# Altium PCB Skayboard.PcbDoc (part 3 of 3)
Units mil, origin at the board's own origin, x right, y up, seen from the top; angles counter-clockwise.
Board outline 13972.57 x 4222.54 mil, 2 copper layers (Top Layer, Bottom Layer); 328 components, 109 nets, 864 pads, 207 vias.
Unrouted connection lines stored in the file: 225.
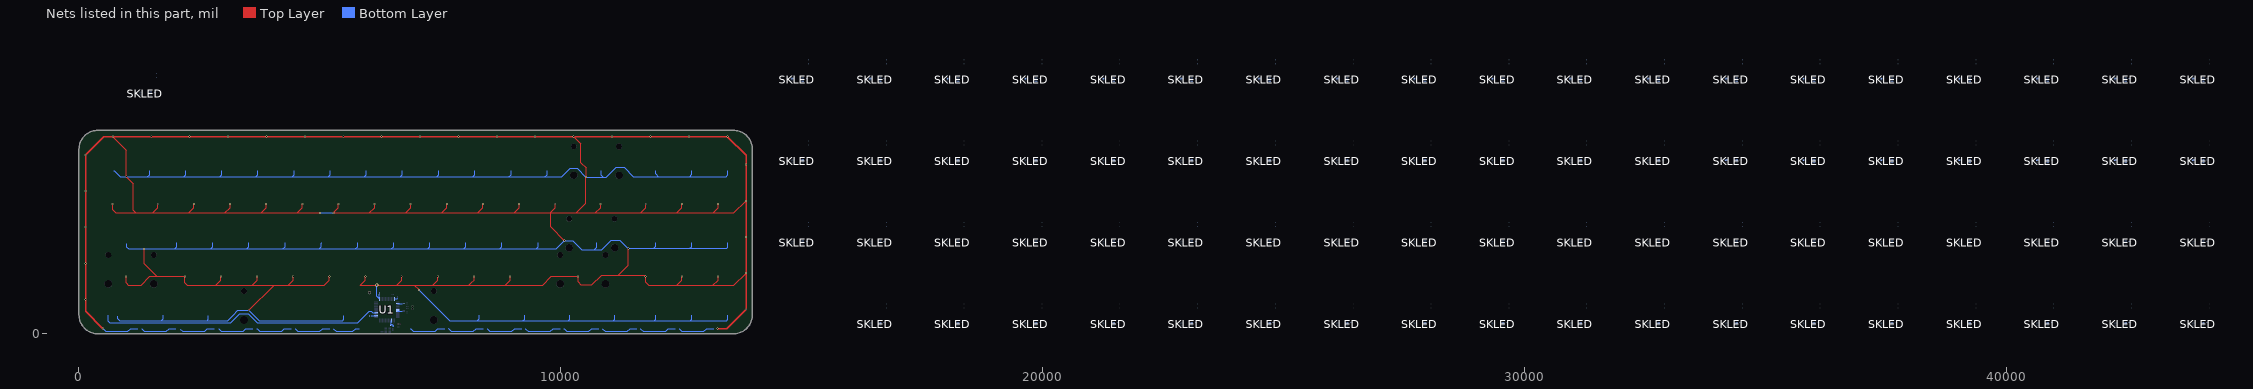
[diagram p3: the nets of this part, all layers, seen from the top]

## Via types
v1: diameter 40, hole 22, Top Layer to Bottom Layer, 116 vias
v2: diameter 24, hole 12, Top Layer to Bottom Layer, 90 vias
v3: diameter 30, hole 15, Top Layer to Bottom Layer, 1 vias

## Nets (pads, with @x,y where several pads share a name; then routed paths per layer and width w, separated by ;. In a path a pad name is that pad's centre, name@x,y a point inside that pad or via, vN(x,y) a via of type N, cw(c..) or ccw(c..) an arc to the next point about the centre after c; other vN are vias at no path point) (continued)
NetSKLED_SKEY52_2: SKLED.2@35996.46,3552.42 SKLED.4@34177.05,3607.54
NetSKLED_SKEY53_2: SKLED.2@37611.16,3552.42 SKLED.4@35791.74,3607.54
NetSKLED_SKEY54_2: SKLED.2@39225.85,3552.42 SKLED.4@37406.43,3607.54
NetSKLED_SKEY55_2: SKLED.2@40840.55,3552.42 SKLED.4@39021.13,3607.54
NetSKLED_SKEY56_2: SKLED.2@42455.24,3552.42 SKLED.4@40635.82,3607.54
NetSKLED_SKEY57_2: SKLED.2@44069.93,3552.42 SKLED.4@42250.51,3607.54
NetSKLED_SKEY58_2: SKLED.2@15005.45,5242.37 SKLED.4@43865.21,3607.54
NetSKLED_SKEY59_2: SKLED.2@16620.14,5242.37 SKLED.4@14800.72,5297.49
NetSKLED_SKEY60_2: SKLED.2@18234.84,5242.37 SKLED.4@16415.42,5297.49
NetSKLED_SKEY61_2: SKLED.2@19849.53,5242.37 SKLED.4@18030.11,5297.49
NetSKLED_SKEY62_2: SKLED.2@21464.22,5242.37 SKLED.4@19644.8,5297.49
NetSKLED_SKEY63_2: SKLED.2@23078.92,5242.37 SKLED.4@21259.5,5297.49
NetSKLED_SKEY64_2: SKLED.2@24693.61,5242.37 SKLED.4@22874.19,5297.49
NetSKLED_SKEY65_2: SKLED.2@26308.3,5242.37 SKLED.4@24488.89,5297.49
NetSKLED_SKEY66_2: SKLED.2@27923,5242.37 SKLED.4@26103.58,5297.49
NetSKLED_SKEY67_2: SKLED.2@29537.69,5242.37 SKLED.4@27718.27,5297.49
NetSKLED_SKEY68_2: SKLED.2@31152.38,5242.37 SKLED.4@29332.97,5297.49
NetSKLED_SKEY69_2: SKLED.2@32767.08,5242.37 SKLED.4@30947.66,5297.49
NetSKLED_SKEY70_2: SKLED.2@34381.77,5242.37 SKLED.4@32562.35,5297.49
NetSKLED_SKEY71_2: SKLED.2@35996.46,5242.37 SKLED.4@34177.05,5297.49
NetSKLED_SKEY72_2: SKLED.2@37611.16,5242.37 SKLED.4@35791.74,5297.49
NetSKLED_SKEY73_2: SKLED.2@39225.85,5242.37 SKLED.4@37406.43,5297.49
NetSKLED_SKEY74_2: SKLED.2@40840.55,5242.37 SKLED.4@39021.13,5297.49
NetSKLED_SKEY75_2: SKLED.2@42455.24,5242.37 SKLED.4@40635.82,5297.49
NetSKLED_SKEY76_2: SKLED.2@44069.93,5242.37 SKLED.4@42250.51,5297.49
NetSKLED_SKEY76_4: SKLED.4@43865.21,5297.49 U1.26 | length 5960.6
  Bottom Layer w5: 602.36,381.31 602.36,263.78 637.8,228.35 3145.67,228.35 3334.65,417.32 3507.87,417.32 3696.31,228.88 5787.94,228.88 6023.62,464.57 6062.99,464.57 6090.55,437.01 U1.26@6165.35,437.01
VCC: C1.1 C7.2 C8.2 C9.2 C10.2 C11.2 C12.2 pad.@6181.1,1011.81 R3.1 SKLED.1 U1.2 U1.6 U1.7 U1.14 U1.24 U1.34 U1.44 | length 116113.2
  Top Layer w25: v1(696.85,2692.91) 696.85,2570.87 759.84,2507.87 1181.1,2507.87 ; v1@701.49,4086.52 980.63,3807.38 v1@980.63,3259.53 ; v1(976.38,1192.91) 976.38,1059.06 1027.58,1007.85 1287.38,1007.85 1472.44,1192.91 1614.17,1192.91 ; v1(980.32,3259.84) v1@980.63,3259.53 ; v1@980.63,3258.53 v1@980.63,3259.53 ; v1(1350.39,1759.84) 1350.39,1456.69 1614.17,1192.91 ; v1(1633.86,2692.91) 1633.86,2614.17 1527.56,2507.87 ; v1(2385.83,2692.91) 2385.83,2616.14 2277.56,2507.87 ; v1(2944.88,1192.91) 2944.88,1112.7 2840.04,1007.85 ; v1(3133.86,2692.91) 3133.86,2614.17 3027.56,2507.88 ; v1(3527.56,488.19) 4047.23,1007.86 ; v1(3696.85,1192.91) 3696.85,1114.67 3590.04,1007.86 ; v1(3881.89,2692.91) 3881.89,2612.2 3777.57,2507.88 ; v1(4444.88,1192.91) 4444.88,1112.71 4340.03,1007.86 ; v1(4633.86,2692.91) 4633.86,2614.16 4527.57,2507.87 ; v1(5000,2507.87) 4527.57,2507.87 ; v1(5196.85,1192.91) 5196.85,1114.68 5090.03,1007.86 4340.03,1007.86 ; v1(5381.89,2692.91) 5381.89,2612.19 5279.53,2509.83 v1(5279.53,2507.87) 6027.57,2507.87 ; v1(5944.88,1192.91) 5944.88,1112.71 5840.03,1007.86 6590.03,1007.86 ; v1(6133.86,2692.91) 6133.86,2614.16 6027.57,2507.87 ; v1(6696.85,1192.91) 6696.85,1114.68 6653.12,1070.94 6590.03,1007.86 ; v1(6881.89,2692.91) 6881.89,2612.19 6777.57,2507.87 ; v1(7051.18,909.45) 7049.11,909.45 7047.24,911.32 7047.24,921.26 6960.65,1007.86 ; v1(7444.88,1192.91) 7444.88,1112.71 7403.12,1070.94 7340.03,1007.86 ; v1(7633.86,2692.91) 7633.86,2614.16 7527.57,2507.87 ; v1(8196.85,1192.91) 8196.85,1114.68 8153.12,1070.94 8090.03,1007.86 ; v1(8381.89,2692.91) 8381.89,2612.19 8277.57,2507.87 ; v1(8944.88,1192.91) 8944.88,1112.71 8840.03,1007.86 ; v1(9133.86,2692.91) 9133.86,2614.16 9027.57,2507.87 ; v1(9881.89,2692.91) 9881.89,2612.19 9777.57,2507.87 9027.57,2507.87 ; v1(10070.87,1933.07) 9783.46,2220.47 9783.46,2507.85 10322.83,2507.85 ; v1@10264.86,4090.27 10415.8,3939.33 10415.8,3546.08 10520.93,3440.95 v1@10520.93,3250.35 ; v1(10519.69,3251.97) 10519.69,2704.7 10322.83,2507.85 ; 10669.29,2507.85 10322.83,2507.85 ; 10669.29,2507.87 10715.05,2507.87 ; v1(10822.83,2692.91) 10822.83,2615.66 10715.05,2507.87 ; v1(11397.64,1771.65) 11397.64,1421.26 11192,1215.62 ; v1(11759.84,2692.91) 11759.84,2615.15 11652.57,2507.87 ; v1(12507.87,1192.91) 12507.87,1113.18 12402.57,1007.88 ; v1(12507.87,2692.91) 12507.87,2613.18 12402.57,2507.87 ; v1(13259.84,1192.91) 13259.84,1115.15 13152.57,1007.88 ; v1(13259.84,2692.91) 13259.84,2611.4 13156.32,2507.87 ; v1(13840.27,1258.93) 13589.22,1007.88 13152.57,1007.88 ; v1@13840.58,2758.92 13840.42,2758.77 13589.53,2507.87 13156.32,2507.87 ; v1@980.63,3259.53 1122.05,3118.11 1122.05,2566.93 1181.1,2507.87 ; 1181.1,2507.87 1527.56,2507.87 ; 1527.56,2507.87 2277.56,2507.87 ; 1614.17,1192.91 v1(2196.85,1192.91) 2196.85,1059.06 2248.06,1007.85 2751.45,1007.85 2840.04,1007.85 ; 2277.56,2507.87 2938.98,2507.87 3027.56,2507.88 ; 2840.04,1007.85 3501.45,1007.85 3590.04,1007.86 ; 3027.56,2507.88 3777.57,2507.88 ; 3590.04,1007.86 4047.23,1007.86 ; 3777.57,2507.87 4527.57,2507.87 ; 4047.23,1007.86 4340.03,1007.86 ; 6027.57,2507.87 6777.57,2507.87 ; 6590.03,1007.86 6960.65,1007.86 ; 6777.57,2507.87 7527.57,2507.87 ; 6960.65,1007.86 7340.03,1007.86 ; 7340.03,1007.86 8090.03,1007.86 ; 7527.57,2507.87 8277.57,2507.87 ; 8090.03,1007.86 8840.03,1007.86 ; 8277.57,2507.87 9027.57,2507.87 ; 8840.03,1007.86 9618.09,1007.86 9803.15,1192.91 v1(10354.33,1192.91) 10354.33,1078.74 10414.84,1018.23 10644.21,1018.23 10841.6,1215.62 11192,1215.62 ; 10715.05,2507.87 11563.99,2507.87 11652.57,2507.87 ; 11192,1215.62 11733.2,1215.62 v1(11755.91,1192.91) 11755.91,1070.87 11818.89,1007.88 12402.57,1007.88 ; 11652.57,2507.87 12402.57,2507.87 ; 12402.57,1007.88 13152.57,1007.88 ; 12402.57,2507.87 13156.32,2507.87
  Top Layer w29: v1(497.64,107.42) 139.73,465.33 v1(139.73,713.62) v1(139.73,2213.62) v1(139.73,3713.67) 514.85,4088.79 700.88,4088.79 v1(702.36,4090.27) v1(2296.11,4090.27) v1(3889.86,4090.27) v1(4686.74,4090.27) v1(7077.36,4090.27) v1(8671.11,4090.27) 10264.86,4090.27 v1(11858.61,4090.27) v1(13452.36,4090.27) 13840.27,3702.36 v1(13840.27,3508.92) 13840.42,3508.77 13840.42,2758.77 13840.42,509.08 v1(13840.58,508.93) 13439.07,107.42 v1(13247.64,107.42)
  Bottom Layer w5: 6465.89,199.06 6489.91,199.06 6499.41,189.57 6499.41,166.41 6502.34,163.48 6527.47,163.48 R3.1@6527.56,163.39
  Bottom Layer w15: 6062.99,374.02 U1.24@6165.35,374.02 ; U1.34@6232.28,724.41 6232.28,821.63 ; 6465.89,199.06 6484.25,217.42 U1.14@6484.25,275.59 ; U1.44@6547.24,724.41 6602.36,724.41 6614.17,736.22 ; U1.7@6614.17,468.5 6708.66,468.5 ; U1.2@6614.17,625.98 6708.66,625.98
  Bottom Layer w20: pad.@6181.1,1011.81 6181.1,775.59 U1.34@6229.47,727.22
  Bottom Layer w25: v1@500.42,104.89 500.48,104.89 504.82,100.55 504.82,100.49 556.56,48.75 1013.48,48.75 1072.18,107.46 1215.87,107.46 ; 716.54,3381.89 736.36,3381.89 740.5,3377.75 740.5,3377.61 858.27,3259.84 v1(980.32,3259.84) 1421.26,3259.84 ; 807.09,369.29 807.09,311.02 842.52,275.59 2657.48,275.59 ; 996.06,1871.49 996.06,1799.21 1035.43,1759.84 v1(1350.39,1759.84) 1984.25,1759.84 ; 1301.29,100.96 1301.7,100.55 1353.47,48.75 1810.35,48.75 1869.06,107.46 2012.75,107.46 ; 1464.57,3385.58 1464.57,3384.91 1464.57,3303.15 1421.26,3259.84 ; 1716.54,283.46 1744.09,311.02 1744.09,385.58 ; 2027.56,1885.58 2027.56,1884.88 2027.56,1803.15 1984.25,1759.84 ; 2098.59,98.95 2148.79,48.75 2607.23,48.75 2665.93,107.46 2809.62,107.46 ; 2212.6,3385.58 2212.6,3303.15 2169.29,3259.84 ; 2685.04,377.7 2685.04,303.15 2657.48,275.59 ; 2775.59,1885.58 2775.59,1803.15 2732.28,1759.84 ; 2895.45,100.55 2896,100.55 2947.8,48.75 3404.1,48.75 3462.81,107.46 3606.5,107.46 ; 2964.57,3385.58 2964.57,3384.91 2964.57,3303.15 2921.26,3259.84 ; 3196.85,389.76 3082.68,275.59 2657.48,275.59 ; 3197.19,390.1 3295.28,488.19 v1(3527.56,488.19) 3740.16,275.59 5467.57,275.59 ; 3527.56,1885.58 3527.56,1884.88 3527.56,1803.15 3484.25,1759.84 ; 3686.76,107.92 3686.76,106.11 3692.32,100.55 3694.14,100.55 3745.97,48.72 4202.55,48.72 4261.25,107.42 4404.94,107.42 ; 3712.6,3385.58 3712.6,3303.15 3669.29,3259.84 ; 4275.59,1885.58 4275.59,1803.15 4232.28,1759.84 ; 4464.57,3385.58 4464.57,3384.91 4464.57,3303.15 4421.26,3259.84 ; 4485.83,103.3 4486.45,103.3 4489.2,100.55 4489.2,99.93 4540.38,48.75 4997.85,48.75 5056.56,107.46 5200.25,107.46 ; v1(5000,2507.87) v1(5279.53,2507.87) ; 5026.13,1884.89 5027.56,1883.46 5027.56,1807.09 4980.31,1759.84 ; 5212.6,3385.58 5212.6,3303.15 5169.29,3259.84 ; 5278.89,107.73 5337.87,48.75 5680.67,48.75 5739.38,107.46 5811.12,107.46 ; 5468.5,275.59 5496.06,303.15 5496.06,377.71 ; 5779.53,1885.58 5779.53,1884.89 5779.53,1803.15 5736.22,1759.84 ; 5964.57,3385.58 5964.57,3384.91 5964.57,3303.15 5921.26,3259.84 ; 6527.56,1885.58 6527.56,1884.89 6527.56,1803.15 6484.25,1759.84 ; 6712.6,3385.58 6712.6,3303.15 6669.29,3259.84 ; 6878.27,101.4 6878.98,101.4 6879.82,100.55 6879.82,99.84 6930.95,48.72 7390.05,48.72 7448.75,107.42 7592.44,107.42 ; v1(7051.18,909.45) 7688.98,271.65 8267.72,271.65 ; 7275.59,1885.58 7275.59,1803.15 7232.28,1759.84 ; 7464.57,3385.58 7464.57,3384.91 7464.57,3303.15 7421.26,3259.84 ; 7666.45,110.79 7669.51,107.73 7676.7,100.55 7676.9,100.55 7728.69,48.75 8185.35,48.75 8244.06,107.46 8387.75,107.46 ; 8027.56,1885.58 8027.56,1884.89 8027.56,1803.15 7984.25,1759.84 ; 8214.33,3385.44 8214.33,3384.91 8214.33,3303.02 8171.16,3259.84 ; 8307.39,384.74 8307.39,311.33 8267.72,271.65 ; 8470.64,103.71 8470.64,103.48 8473.57,100.55 8473.8,100.55 8525.63,48.72 8983.8,48.72 9042.5,107.42 9186.19,107.42 ; 8775.59,1885.58 8775.59,1803.15 8732.28,1759.84 ; 8964.57,3385.58 8964.57,3384.91 8964.57,3303.15 8921.26,3259.84 ; 9244.09,385.58 9244.09,303.15 9212.6,271.65 ; 9267.62,102.58 9268.42,102.58 9270.45,100.55 9270.45,99.75 9321.48,48.72 9780.67,48.72 9839.38,107.42 9983.07,107.42 ; 9527.56,1885.58 9527.56,1884.89 9527.56,1803.15 9484.25,1759.84 ; 9712.6,3385.58 9712.6,3303.15 9669.29,3259.84 ; 10062.14,105.84 10062.14,105.73 10067.32,100.55 10067.43,100.55 10119.26,48.72 10577.55,48.72 10636.25,107.42 10779.94,107.42 ; 10181.1,385.58 10181.1,303.15 10149.61,271.65 ; 10744.09,1885.83 10744.09,1799.21 10688.98,1744.09 ; 10838.67,3384.91 10838.67,3287.31 10874.02,3251.97 ; 10862,102.74 10916.03,48.72 11374.42,48.72 11433.13,107.42 11576.82,107.42 ; 11118.11,385.58 11118.11,303.15 11086.61,271.65 ; 11654.66,101.93 11659.69,101.93 11661.07,100.55 11661.07,95.52 11707.72,48.87 12170.81,48.87 12229.51,107.58 12373.2,107.58 ; 11963.67,3384.91 11963.67,3315.86 12015.75,3263.78 ; 11964.57,385.58 11964.57,384.91 11964.57,303.15 11933.07,271.65 ; 11964.57,1885.58 11964.57,1884.91 11964.57,1814.96 11921.26,1771.65 ; 12450.76,107.42 12451.07,107.42 12457.95,100.55 12457.95,100.24 12509.43,48.75 12966.6,48.75 13025.31,107.46 13169,107.46 ; 12712.6,385.58 12712.6,303.15 12681.1,271.65 ; 12713.64,3384.93 12713.64,3308.13 12669.29,3263.78 ; 12716.54,1885.58 12716.54,1884.91 12716.54,1811.02 12677.17,1771.65 ; 13463.67,384.91 13463.67,378.62 13464.57,377.73 13464.57,299.21 13437.01,271.65 12681.1,271.65 ; 13464.57,1889.51 13464.57,1884.91 13464.57,1799.21 13437.01,1771.65 12677.17,1771.65 ; 13464.57,3385.58 13464.57,3384.91 13464.57,3303.15 13425.2,3263.78 12669.29,3263.78 ; 1421.26,3259.84 2169.29,3259.84 ; 1984.25,1759.84 2732.28,1759.84 ; 2169.29,3259.84 2921.26,3259.84 ; 2732.28,1759.84 3484.25,1759.84 ; 2921.26,3259.84 3669.29,3259.84 ; 3484.25,1759.84 4232.28,1759.84 ; 3669.29,3259.84 4421.26,3259.84 ; 4232.28,1759.84 4980.31,1759.84 ; 4421.26,3259.84 5169.29,3259.84 ; 4980.31,1759.84 5736.22,1759.84 ; 5169.29,3259.84 5921.26,3259.84 ; 5736.22,1759.84 6484.25,1759.84 ; 5921.26,3259.84 6669.29,3259.84 ; 6484.25,1759.84 7232.28,1759.84 ; 6669.29,3259.84 7421.26,3259.84 ; 7232.28,1759.84 7984.25,1759.84 ; 7421.26,3259.84 8171.16,3259.84 ; 7984.25,1759.84 8732.28,1759.84 ; 8171.16,3259.84 8921.26,3259.84 ; 8267.72,271.65 9212.6,271.65 ; 8732.28,1759.84 9484.25,1759.84 ; 8921.26,3259.84 9669.29,3259.84 ; 9212.6,271.65 10149.61,271.65 ; 9484.25,1759.84 9897.64,1759.84 v1(10070.87,1933.07) 10240.16,1933.07 10429.13,1744.09 10688.98,1744.09 ; 9669.29,3259.84 10011.81,3259.84 10188.98,3437.01 10334.65,3437.01 v1(10519.69,3251.97) 10874.02,3251.97 ; 10149.61,271.65 11086.61,271.65 ; 10688.98,1744.09 10842.52,1744.09 11043.31,1944.88 11216.54,1944.88 11389.76,1771.65 v1(11397.64,1771.65) 11921.26,1771.65 ; 10874.02,3251.97 10944.88,3251.97 11145.67,3452.76 11311.02,3452.76 11500,3263.78 12015.75,3263.78 ; 11086.61,271.65 11933.07,271.65 ; 11921.26,1771.65 12677.17,1771.65 ; 11933.07,271.65 12681.1,271.65 ; 12015.75,3263.78 12669.29,3263.78
  Bottom Layer w27.56: 8307.39,384.74 8307.39,384.89
  other v1: 139.42,1460.65 13840.58,2008.92 13840.27,2758.92 139.42,2960.65 1499.24,4090.58 3090.02,4090.58 5483.61,4090.58 6280.49,4090.58 7871.27,4090.58 9465.02,4090.58 10264.86,4090.58 11061.74,4090.58 12655.49,4090.58
pads on no net: ?. U1.27 U1.28 U1.36
copper on no net: | length 90323.7
  Top Layer w5: 5508.8,2226.26 5523.79,2211.27 ; v2(5842.52,464.57) 8023.62,464.57 v2(8102.36,385.83) ; v2(6173.23,55.12) v2(6614.17,55.12) ; 8711.33,3711.29 8722.45,3700.16 8722.45,3279.53 8856.31,3145.67 ; v2(8856.31,2578.74) 8856.31,3145.67 ; v2@9050.43,2429.13 9268.31,2211.26 ; 9086.33,2961.29 9082.39,2965.23 9036.75,2965.23 8856.31,3145.67 ; v2(11492.13,2429.13) 11492.8,2429.13 11710.65,2211.29 11711.33,2211.29 11720.47,2202.14 11720.47,1457.27 ; v2@11492.13,2574.8 v2(11492.13,2582.68) ; 11492.13,2760.67 v2(11492.13,2582.68) ; 11711.33,3711.29 11724.41,3698.2 11724.41,2974.37 11711.33,2961.29 ; 11715.26,2961.29 11711.33,2961.29 ; v2@12238.84,2433.1 12460.62,2211.31 ; v2(12240.16,2574.8) 12240.16,2822.83 12378.61,2961.29 12461.33,2961.29 12463.29,2961.29 ; 12461.33,2211.29 12470.44,2202.17 12470.44,1457.3 ; 12461.3,3711.31 12474.38,3698.23 12474.38,2974.4 ; v2(12988.19,2574.8) 12988.19,2822.83 13126.64,2961.29 13211.33,2961.29 ; v2@12988.86,2433.07 13210.65,2211.29 ; 13211.33,2211.28 13220.47,2202.14 13220.47,1457.27 ; 13211.33,3711.29 13224.41,3698.2 13224.41,2974.37 ; v2(11492.13,2582.68) 11492.13,2822.83 11630.58,2961.29 11711.33,2961.29
  Top Layer w25: 5090.03,1007.86 5840.03,1007.86
  Bottom Layer w5: 139.73,508.9 139.73,373.38 346.32,166.79 497.64,166.79 ; 139.73,1258.9 139.73,1033.5 196.85,976.38 196.85,712.6 ; 139.73,2010.86 139.73,1785.46 196.85,1728.35 196.85,1464.57 ; 139.73,2758.9 139.73,2533.5 196.85,2476.38 196.85,2212.6 ; 141.67,3509.92 141.67,3284.52 198.79,3227.4 198.79,2963.62 ; 198.79,3713.67 198.79,3887.21 402.13,4090.55 497.35,4090.55 497.64,4090.27 ; 507.87,3386.56 507.87,2657.48 531.5,2633.86 695.08,2633.86 ; 700.79,4031.5 976.38,4031.5 1037.94,4093.06 1293.7,4093.06 ; 702.36,107.73 958.13,107.73 1019.68,169.29 1295.28,169.29 ; 713.63,3443.99 714.53,3444.88 952.76,3444.88 1012.73,3384.91 1258.94,3384.91 ; 791.34,1899.65 791.34,1173.23 830.71,1133.86 959.8,1133.86 ; 827.73,444.88 1141.73,444.88 1200.79,385.83 1539.22,385.83 1540.16,384.88 ; 904.39,2692.91 1232.28,2692.91 1291.34,2633.86 1632.9,2633.86 1633.95,2634.91 ; 996.69,1944.88 1381.89,1944.88 1440.94,1885.83 1800.71,1885.83 ; 1200.73,1192.91 1685.04,1192.91 1764.72,1113.23 2155.09,1113.23 2175.71,1133.86 2181.1,1133.86 ; 1466.49,3444.88 1704.72,3444.88 1764.7,3384.91 2010.9,3384.91 ; 1500,4031.5 1775.59,4031.5 1837.15,4093.06 2092.91,4093.06 ; 1501.57,103.8 1757.34,103.8 1818.9,165.35 2094.49,165.35 ; 1772.68,444.88 2079.24,444.88 2138.3,385.83 2476.72,385.83 2477.66,384.89 ; 1838.68,2693.96 1839.72,2692.91 2079.73,2692.91 2138.78,2633.86 2364.88,2633.86 ; 2047.66,1944.88 2265.2,1944.88 2324.26,1885.83 2542.42,1885.83 ; 2214.53,3444.88 2452.76,3444.88 2512.73,3384.91 2758.94,3384.91 ; 2295.28,4027.56 2570.87,4027.56 2632.43,4089.12 2888.19,4089.12 ; 2296.85,103.8 2552.61,103.8 2614.17,165.35 2889.76,165.35 ; 2423.73,1192.91 2642.18,1192.91 2701.23,1133.86 2919.12,1133.86 ; 2602.14,2692.91 2829.73,2692.91 2888.78,2633.86 3108.72,2633.86 ; 2695.17,444.88 3141.73,444.88 3259.84,562.99 3559.06,562.99 3736.22,385.83 5262.93,385.83 ; 2808.29,1944.88 3015.2,1944.88 3074.26,1885.83 3291.33,1885.83 ; 2966.49,3444.88 3204.72,3444.88 3264.7,3384.91 3510.9,3384.91 ; 3094.49,4031.5 3370.08,4031.5 3431.64,4093.06 3687.4,4093.06 ; 3096.06,103.8 3351.83,103.8 3413.39,165.35 3688.98,165.35 ; 3172.94,1192.91 3392.18,1192.91 3451.23,1133.86 3664.74,1133.86 ; 3346.07,2692.91 3579.73,2692.91 3638.78,2633.86 3872.49,2633.86 ; 3549.78,1944.88 3765.2,1944.88 3824.26,1885.83 4042.03,1885.83 ; 3718.46,3444.88 3956.69,3444.88 4016.67,3384.91 4262.87,3384.91 ; 3891.34,103.8 4147.1,103.8 4208.66,165.35 4484.25,165.35 ; 3893.7,4027.56 4169.29,4027.56 4230.85,4089.12 4486.61,4089.12 ; 3923.58,1192.91 4142.19,1192.91 4201.24,1133.86 4432.04,1133.86 ; 4109.72,2692.91 4329.74,2692.91 4388.8,2633.86 4607.66,2633.86 ; 4300.35,1944.88 4515.21,1944.88 4574.27,1885.83 4790.23,1885.83 ; 4466.49,3444.88 4704.72,3444.88 4764.7,3384.91 5010.9,3384.91 ; 4662.29,1192.91 4892.19,1192.91 4951.24,1133.86 5168.45,1133.86 ; 4686.61,103.8 4942.38,103.8 5003.94,165.35 5279.53,165.35 ; 4688.98,4031.5 4964.57,4031.5 5026.13,4093.06 5281.89,4093.06 ; 4838.69,2693.96 4839.74,2692.91 5079.74,2692.91 5138.8,2633.86 5362.78,2633.86 ; 5058.37,1944.88 5265.21,1944.88 5324.27,1885.83 5544.6,1885.83 ; 5218.46,3444.88 5456.69,3444.88 5516.67,3384.91 5762.87,3384.91 ; 5418.48,1192.91 5642.19,1192.91 5701.24,1133.86 5916.47,1133.86 ; 5483.61,107.73 5643.17,107.73 5704.72,169.29 5885.83,169.29 5889.76,165.35 ; 5484.25,4027.56 5759.84,4027.56 5821.4,4089.12 6077.17,4089.12 ; 5511.81,440.94 5535.43,464.57 v2(5842.52,464.57) ; 5608.71,2692.91 5829.74,2692.91 5888.8,2633.86 6123.92,2633.86 ; 5806.24,1944.88 6015.21,1944.88 6074.27,1885.83 6304.05,1885.83 ; v1@5842.52,523.62 5881.89,484.25 6090.55,484.25 6106.3,468.5 6165.35,468.5 ; v1(5842.52,598.43) 5901.57,539.37 5933.07,507.87 6102.36,507.87 6108.96,501.27 6164.08,501.27 6165.35,500 ; 5966.49,3444.88 6204.72,3444.88 6264.7,3384.91 6510.9,3384.91 ; 6094.49,107.73 6114.17,107.73 6166.79,55.12 v2(6173.23,55.12) ; 6166.24,1192.91 6392.19,1192.91 6451.24,1133.86 6673.77,1133.86 ; v1(6259.84,905.51) 6295.28,870.08 6295.28,724.41 ; 6279.53,4031.5 6555.12,4031.5 6616.68,4093.06 6872.44,4093.06 ; 6367.38,2692.91 6579.74,2692.91 6638.8,2633.86 6858.37,2633.86 ; 6421.26,275.59 6422.64,274.21 6422.64,138.38 6423.76,137.26 6423.76,133.33 6444.88,112.2 6448.82,112.2 ; 6560.55,1944.88 6765.21,1944.88 6824.27,1885.83 7043.59,1885.83 ; v2(6614.17,55.12) 6676.87,55.12 6788.54,166.79 6872.64,166.79 ; 6714.53,3444.88 6952.76,3444.88 7012.73,3384.91 7258.94,3384.91 ; 6918.92,1192.91 7142.19,1192.91 7201.24,1133.86 7419.34,1133.86 ; 7078.74,4031.5 7354.33,4031.5 7415.89,4093.06 7671.65,4093.06 ; 7080.32,103.8 7336.08,103.8 7397.64,165.35 7673.23,165.35 ; 7091.74,2692.91 7329.74,2692.91 7388.8,2633.86 7598.16,2633.86 ; 7308.51,1944.88 7515.21,1944.88 7574.27,1885.83 7791,1885.83 ; 7466.49,3444.88 7704.72,3444.88 7764.7,3384.91 8010.9,3384.91 ; 7672.6,1192.91 7892.19,1192.91 7951.24,1133.86 8168.58,1133.86 ; 7865.9,2692.91 8079.74,2692.91 8138.8,2633.86 8360.46,2633.86 ; 7874.02,4027.56 8149.61,4027.56 8211.17,4089.12 8466.93,4089.12 ; 7875.59,103.8 8131.35,103.8 8192.91,165.35 8468.5,165.35 ; 8054.69,1944.88 8265.21,1944.88 8324.27,1885.83 8536.01,1885.83 ; 8214.53,3444.88 8452.76,3444.88 8512.73,3384.91 8758.94,3384.91 ; 8342.89,444.88 8641.76,444.88 8700.81,385.83 9009.42,385.83 ; 8428.94,1192.91 8642.19,1192.91 8701.24,1133.86 8922.43,1133.86 ; 8608.01,2692.91 8829.74,2692.91 8888.8,2633.86 9129.92,2633.86 ; 8669.29,4031.5 8944.88,4031.5 9006.44,4093.06 9262.2,4093.06 ; 8670.87,103.8 8926.63,103.8 8988.19,165.35 9263.78,165.35 ; 8804.09,1944.88 9015.21,1944.88 9074.27,1885.83 9284.14,1885.83 ; v2(8856.31,2578.74) 9005.92,2429.13 v2(9045.29,2429.13) ; 8966.49,3444.88 9204.72,3444.88 9264.7,3384.91 9510.9,3384.91 ; 9176.64,1192.91 10145.67,1192.91 10204.72,1133.86 10326.41,1133.86 ; 9256.38,444.88 9579.24,444.88 9638.29,385.83 9962.61,385.83 ; 9348.83,2692.91 9579.74,2692.91 9638.8,2633.86 9872.4,2633.86 ; 9468.5,4031.5 9744.09,4031.5 9805.65,4093.06 10061.42,4093.06 ; 9470.08,103.8 9725.84,103.8 9787.4,165.35 10062.99,165.35 ; 9543.31,1944.88 9602.36,2003.94 10287.4,2003.94 10405.51,1885.83 10539.21,1885.83 10540.15,1884.89 ; 9708.66,3440.94 9791.34,3523.62 10366.14,3523.62 10503.94,3385.83 10633.86,3385.83 ; 10088.69,2693.96 10089.74,2692.91 10429.13,2692.91 10488.19,2633.86 10802.54,2633.86 ; 10182.39,443.95 10183.33,444.88 10516.76,444.88 10575.81,385.83 10890.18,385.83 ; 10265.35,103.8 10521.12,103.8 10582.68,165.35 10858.27,165.35 ; 10267.72,4031.5 10543.31,4031.5 10604.87,4093.06 10860.63,4093.06 ; 10582.01,1192.91 11059.06,1192.91 11141.73,1110.24 11714.6,1110.24 11738.23,1133.86 11759.84,1133.86 ; 10744.09,1944.88 10826.77,2027.56 10850.39,2027.56 ; 10838.67,3443.96 10858.36,3443.96 10938.02,3523.62 11456.69,3523.62 11594.49,3385.83 11759.84,3385.83 ; 10850.16,2027.56 11318.9,2027.56 11483.2,1863.25 11717.61,1863.25 11736.22,1881.87 ; 11037.96,2692.91 11468.5,2692.91 11527.56,2633.86 11747.9,2633.86 ; 11062.99,4031.5 11338.58,4031.5 11400.14,4093.06 11655.91,4093.06 ; 11064.57,103.8 11320.33,103.8 11381.89,165.35 11657.48,165.35 ; 11136.36,444.88 11454.24,444.88 11513.29,385.83 11738.73,385.83 ; v2(11492.13,2429.13) v2(11492.13,2582.68) ; 11858.27,4031.5 12133.86,4031.5 12195.42,4093.06 12451.18,4093.06 ; 11859.84,103.8 12115.61,103.8 12177.17,165.35 12452.76,165.35 ; 11966.49,3444.88 12204.72,3444.88 12264.7,3384.91 12510.9,3384.91 ; 11976.7,444.88 12202.78,444.88 12261.83,385.83 12481.42,385.83 ; 11982.85,1192.91 12204.74,1192.91 12263.8,1133.86 12475.51,1133.86 ; 11988.48,2692.91 12204.74,2692.91 12263.8,2633.86 12492.42,2633.86 ; 11991.19,1944.88 12202.77,1944.88 12261.83,1885.83 12482.47,1885.83 ; v2(12238.16,2433.1) 12240.16,2435.09 v2(12240.16,2574.8) ; 12657.48,4031.5 12933.07,4031.5 12994.63,4093.06 13250.39,4093.06 ; 12659.06,103.8 12914.82,103.8 12976.38,165.35 13251.97,165.35 ; 12714.53,3444.88 12952.76,3444.88 13012.73,3384.91 13258.94,3384.91 ; 12731.11,1944.88 12952.77,1944.88 13011.83,1885.83 13232.54,1885.83 ; 12736.3,444.88 12958.51,444.88 13017.56,385.83 13233.97,385.83 ; 12739.63,1192.91 12954.74,1192.91 13013.8,1133.86 13230.45,1133.86 ; 12746.18,2692.91 12954.74,2692.91 13013.8,2633.86 13243.35,2633.86 ; v2(12988.19,2433.07) v2(12988.19,2574.8) ; 13452.36,107.73 13532.97,107.73 13783.46,358.23 13783.46,506.68 13781.21,508.93 ; 13463.67,3443.96 13573.88,3443.96 13574.8,3444.88 13610.24,3444.88 13840.27,3674.91 13840.27,3713.65 ; 13463.69,444.88 13590.55,444.88 13641.73,496.06 13641.73,1137.8 13586.61,1192.91 13493.97,1192.91 ; 13463.69,2693.96 13464.74,2692.91 13610.24,2692.91 13641.73,2661.42 13641.73,2019.68 13566.93,1944.88 13502.71,1944.88 ; 13779.53,1259.84 13779.53,996.06 13836.65,938.94 13836.65,713.55 ; 13781.21,2008.92 13781.21,1745.14 13838.33,1688.03 13838.33,1462.63 ; 13781.21,2758.92 13781.21,2495.14 13838.33,2438.03 13838.33,2212.63 ; 13781.21,3508.92 13781.21,3245.14 13838.33,3188.03 13838.33,2962.63
  Bottom Layer w15: 6484.25,724.41 6485.9,726.06 6485.9,816.22 6488.58,818.9
  Bottom Layer w20: 6454.72,106.3 6507.87,106.3
  other v1: 5842.52,527.56

## Polygon pours and split planes (outlines as drawn)
VCC on Bottom Layer "VCC_L02_P004" (solid, remove dead copper, pour order 4): 6452.76,724.41 6436.01,707.66 6160.53,707.66 6160.53,284.11 6171.92,272.72 6177.1,277.9 6569.69,325.61 6615.67,714.39 6603.24,726.82
no net on Bottom Layer "NONET_L02_P005" (solid, pour order 5): 6570.1,728.89 6551.46,710.25 6173.48,710.25 6173.48,256.67 6183.83,246.31

## Other copper
Bottom Layer:
  rectangle net VCC: 6586.61,468.5 6641.73,500

## Silkscreen, mask and mechanical layers (free items; w line width, h text height)
Top Overlay:
  text "- By Skaytacium and NNNI" at 455.36,1835.59 h70 r90
  text "Skayboard" at 375.86,1445.88 h250 r90